# EAGLE board MMDC_1 (EAGLE 5.01)
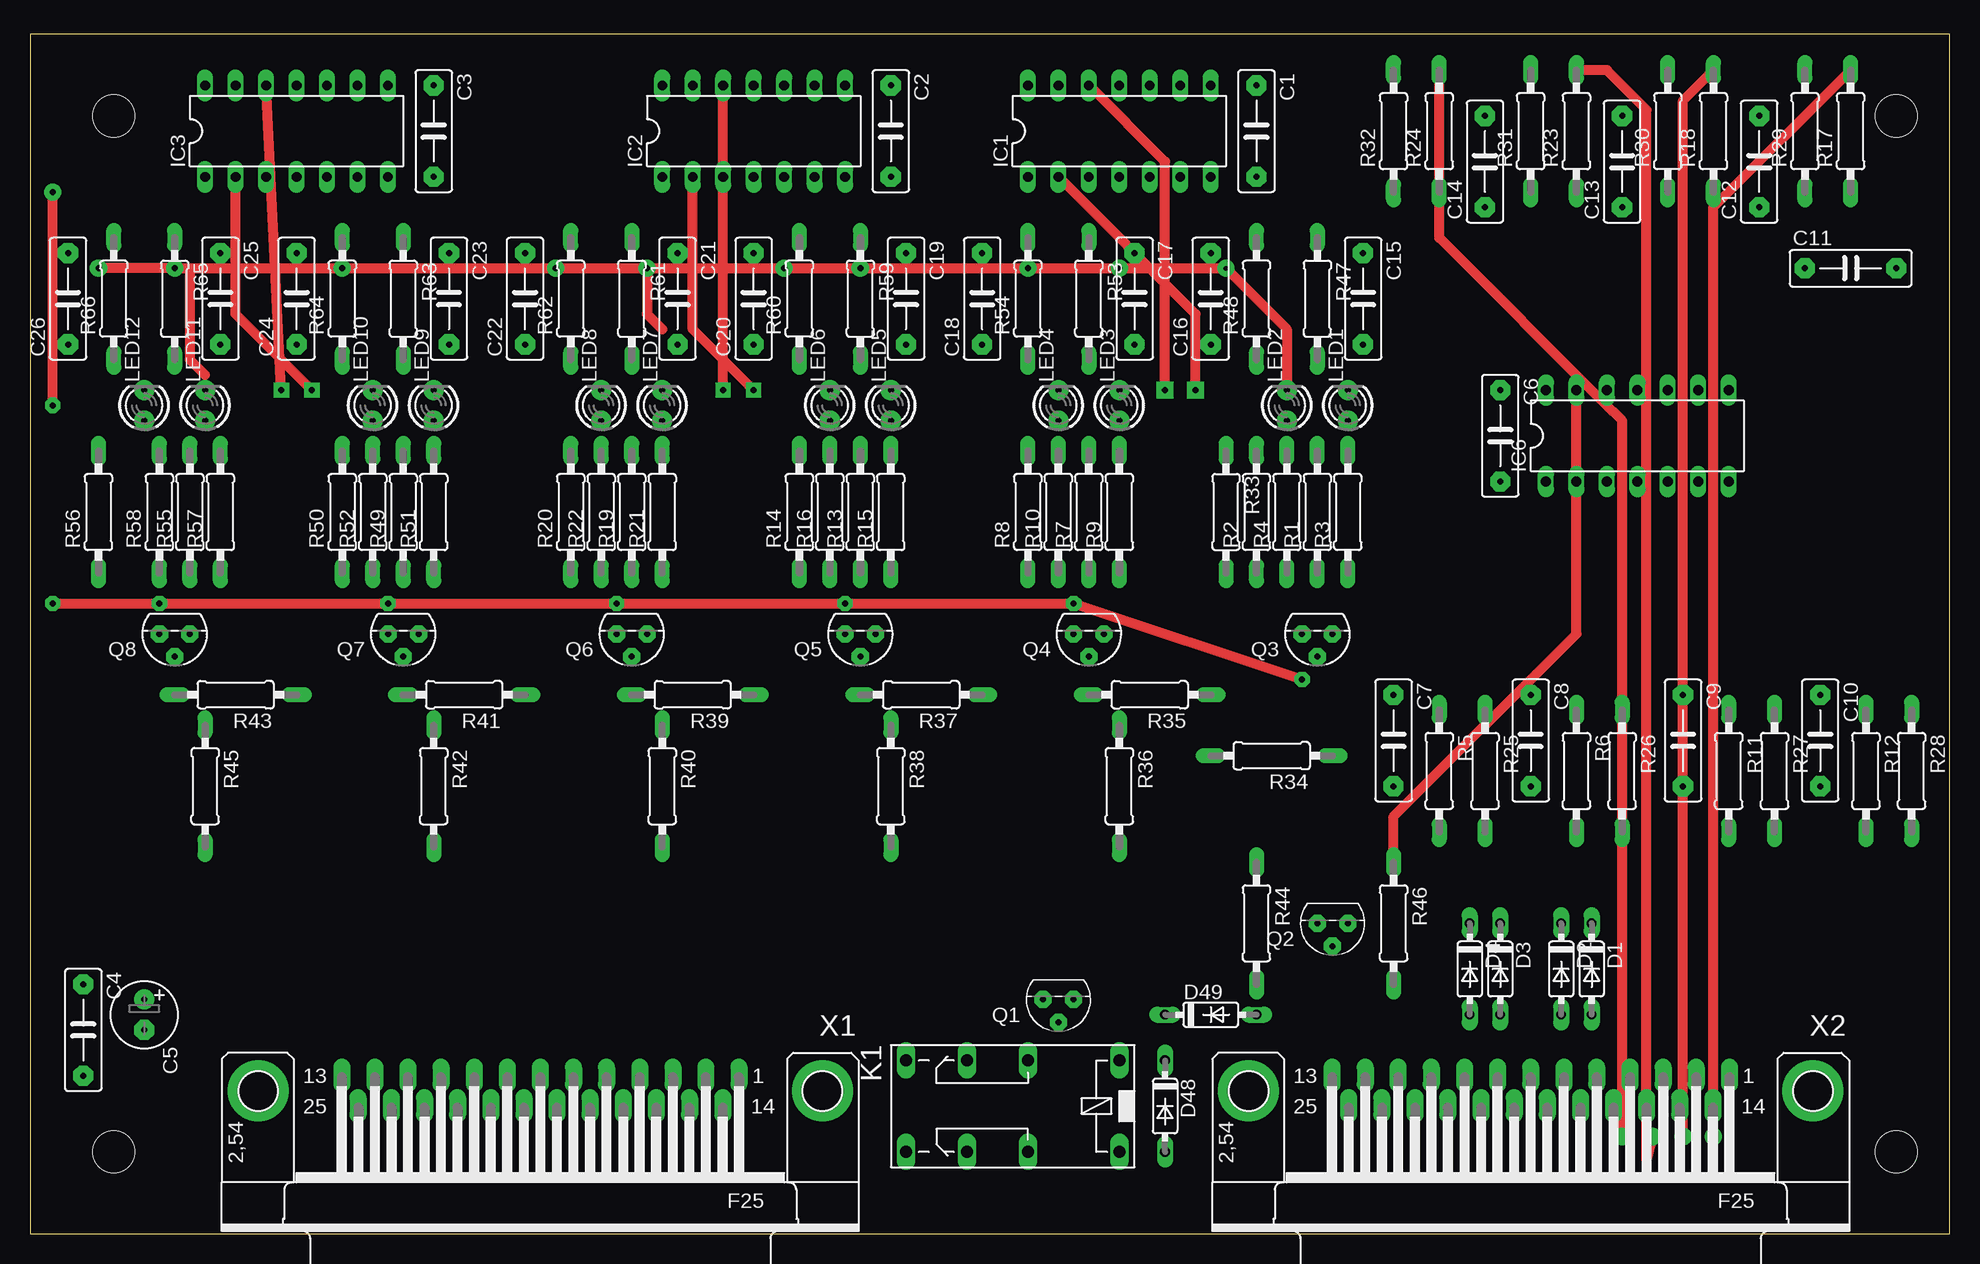
[diagram p0: board, top side]
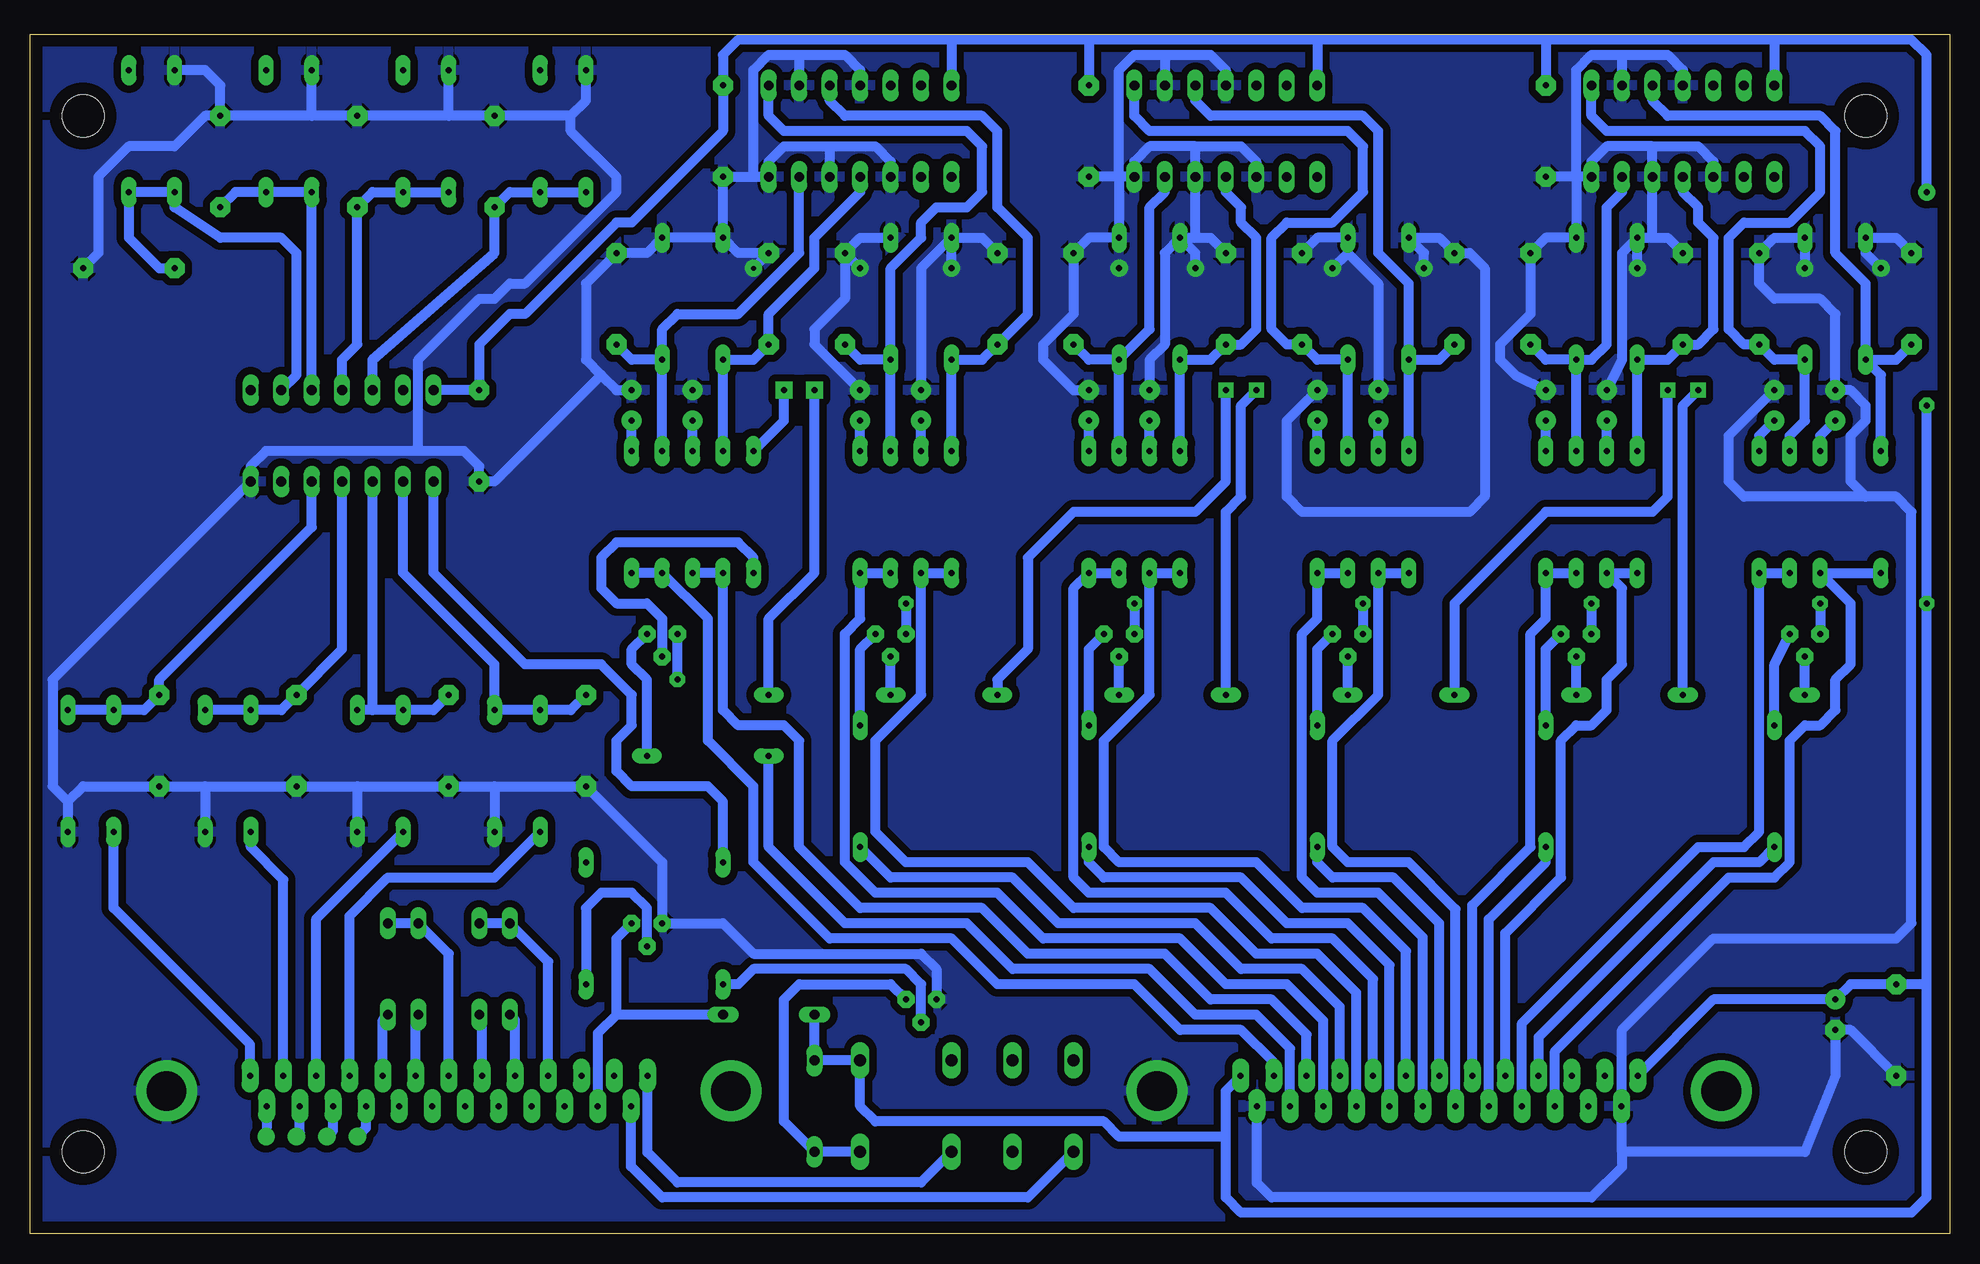
[diagram p1: board, bottom side, seen from below]

Size 160 x 100 mm. Coordinates in mm from the lower left corner, seen from the top.
Outline: 0,0 160,0 160,100 0,100 0,0
Copper layers (1*16): Top 0.035mm / dielectric 1.5mm / Bottom 0.035mm
Design rules "default *": minimum track width 10mil, minimum drill 24mil, track to track 8mil, track to pad 8mil, pad to pad 8mil, via to via 8mil, smd to smd 8mil, copper to edge 40mil, drill to drill 8mil, minimum pad ring 10mil, minimum via ring 8mil, stop-mask expansion 4mil, vias tented up to drill 0mil, thermal gap 10mil
Holes 3.5 mm at 6.98,6.82 6.98,93.18 155.57,6.82 155.57,93.18

## Footprints (pad centres in the part's own frame; a part is rotated, then mirrored left to right if it is on the bottom)
C075-032X103_XL_PAD = drill 0.5 pad 1.676 octagon: 1 -3.81,0; 2 3.81,0
E2,5-6_XL_PAD = drill 0.5 pad 1.676 round: + -1.27,0 | drill 0.5 pad 1.676 octagon: - 1.27,0
DO35-7 = drill 0.813 long: A 3.81,0; C -3.81,0
DIL14 = drill 0.813 long: 1 -7.62,-3.81; 2 -5.08,-3.81; 3 -2.54,-3.81; 4 0,-3.81; 5 2.54,-3.81; 6 5.08,-3.81; 7 7.62,-3.81; 8 7.62,3.81; 9 5.08,3.81; 10 2.54,3.81; 11 0,3.81; 12 -2.54,3.81; 13 -5.08,3.81; 14 -7.62,3.81
351 = drill 1.016 long: 1 -3.81,-3.81; 16 -3.81,3.81; O1 8.89,-3.81; O2 8.89,3.81; P1 3.81,-3.81; P2 3.81,3.81; S1 13.97,-3.81; S2 13.97,3.81
LED3MM_XL_PAD = drill 0.5 pad 1.676 round: A -1.27,0; K 1.27,0
TO92_XL_PAD = drill 0.5 pad 1.422 octagon: 1 1.27,0; 2 0,1.905; 3 -1.27,0
0207/10_OVAL = drill 0.5 pad 1.27 long: 1 -5.08,0; 2 5.08,0
F25HP_XL_PAD = drill 0.5 pad 1.422 long: 1 -16.561,-1.27; 2 -13.792,-1.27; 3 -11.049,-1.27; 4 -8.28,-1.27; 5 -5.512,-1.27; 6 -2.769,-1.27; 7 0,-1.27; 8 2.769,-1.27; 9 5.512,-1.27; 10 8.28,-1.27; 11 11.049,-1.27; 12 13.792,-1.27; 13 16.561,-1.27; 14 -15.189,1.27; 15 -12.421,1.27; 16 -9.652,1.27; 17 -6.909,1.27; 18 -4.14,1.27; 19 -1.372,1.27; 20 1.372,1.27; 21 4.14,1.27; 22 6.909,1.27; 23 9.652,1.27; 24 12.421,1.27; 25 15.189,1.27 | drill 3.302 pad 5.08 round: G1 -23.52,0; G2 23.52,0

## Placement (x,y rotation side)
C1  100nF  [C075-032X103_XL_PAD]  102.23,91.91 270 top
C2  100nF  [C075-032X103_XL_PAD]  71.75,91.91 270 top
C3  100nF  [C075-032X103_XL_PAD]  33.65,91.91 270 top
C4  100nF  [C075-032X103_XL_PAD]  4.44,16.98 270 top
C5  100uF  [E2,5-6_XL_PAD]  9.52,18.25 270 top
C6  100nF  [C075-032X103_XL_PAD]  122.55,66.51 270 top
C7  100nF  [C075-032X103_XL_PAD]  113.66,41.11 270 top
C8  100nF  [C075-032X103_XL_PAD]  125.09,41.11 270 top
C9  100nF  [C075-032X103_XL_PAD]  137.79,41.11 270 top
C10  100nF  [C075-032X103_XL_PAD]  149.22,41.11 270 top
C11  100nF  [C075-032X103_XL_PAD]  151.76,80.48 0 top
C12  100nF  [C075-032X103_XL_PAD]  144.14,89.37 90 top
C13  100nF  [C075-032X103_XL_PAD]  132.71,89.37 90 top
C14  100nF  [C075-032X103_XL_PAD]  121.28,89.37 90 top
C15  100nF  [C075-032X103_XL_PAD]  111.12,77.94 270 top
C16  100nF  [C075-032X103_XL_PAD]  98.42,77.94 90 top
C17  100nF  [C075-032X103_XL_PAD]  92.07,77.94 270 top
C18  100nF  [C075-032X103_XL_PAD]  79.37,77.94 90 top
C19  100nF  [C075-032X103_XL_PAD]  73.02,77.94 270 top
C20  100nF  [C075-032X103_XL_PAD]  60.32,77.94 90 top
C21  100nF  [C075-032X103_XL_PAD]  53.97,77.94 270 top
C22  100nF  [C075-032X103_XL_PAD]  41.27,77.94 90 top
C23  100nF  [C075-032X103_XL_PAD]  34.92,77.94 270 top
C24  100nF  [C075-032X103_XL_PAD]  22.22,77.94 90 top
C25  100nF  [C075-032X103_XL_PAD]  15.87,77.94 270 top
C26  100nF  [C075-032X103_XL_PAD]  3.17,77.94 90 top
D1  1N4148DO35-7  [DO35-7]  130.17,22.06 270 top
D2  1N4148DO35-7  [DO35-7]  127.63,22.06 270 top
D3  1N4148DO35-7  [DO35-7]  122.55,22.06 270 top
D4  1N4148DO35-7  [DO35-7]  120.01,22.06 270 top
D48  shotcky  [DO35-7]  94.61,10.63 270 top
D49  shotcky  [DO35-7]  98.42,18.25 0 top
IC1  4013N  [DIL14]  90.8,91.91 0 top
IC2  4013N  [DIL14]  60.32,91.91 0 top
IC3  4013N  [DIL14]  22.22,91.91 0 top
IC6  4082N  [DIL14]  133.98,66.51 0 top
K1  351  [351]  86.99,10.63 180 top
LED1  red  [LED3MM_XL_PAD]  109.85,69.05 90 top
LED2  red  [LED3MM_XL_PAD]  104.77,69.05 90 top
LED3  red  [LED3MM_XL_PAD]  90.8,69.05 90 top
LED4  red  [LED3MM_XL_PAD]  85.72,69.05 90 top
LED5  red  [LED3MM_XL_PAD]  71.75,69.05 90 top
LED6  red  [LED3MM_XL_PAD]  66.67,69.05 90 top
LED7  red  [LED3MM_XL_PAD]  52.7,69.05 90 top
LED8  red  [LED3MM_XL_PAD]  47.62,69.05 90 top
LED9  red  [LED3MM_XL_PAD]  33.65,69.05 90 top
LED10  red  [LED3MM_XL_PAD]  28.57,69.05 90 top
LED11  red  [LED3MM_XL_PAD]  14.6,69.05 90 top
LED12  red  [LED3MM_XL_PAD]  9.52,69.05 90 top
Q1  BC547"  [TO92_XL_PAD]  85.72,19.52 180 top
Q2  BC547"  [TO92_XL_PAD]  108.58,25.87 180 top
Q3  BC557"  [TO92_XL_PAD]  107.31,50 180 top
Q4  BC557"  [TO92_XL_PAD]  88.26,50 180 top
Q5  BC557"  [TO92_XL_PAD]  69.21,50 180 top
Q6  BC557"  [TO92_XL_PAD]  50.16,50 180 top
Q7  BC557"  [TO92_XL_PAD]  31.11,50 180 top
Q8  BC557"  [TO92_XL_PAD]  12.06,50 180 top
R1  10K  [0207/10_OVAL]  107.31,60.16 90 top
R2  10K  [0207/10_OVAL]  102.23,60.16 90 top
R3  500E  [0207/10_OVAL]  109.85,60.16 90 top
R4  500E  [0207/10_OVAL]  104.77,60.16 90 top
R5  10K  [0207/10_OVAL]  117.47,38.57 270 top
R6  10K  [0207/10_OVAL]  128.9,38.57 270 top
R7  10K  [0207/10_OVAL]  88.26,60.16 90 top
R8  10K  [0207/10_OVAL]  83.18,60.16 90 top
R9  500E  [0207/10_OVAL]  90.8,60.16 90 top
R10  500E  [0207/10_OVAL]  85.72,60.16 90 top
R11  10K  [0207/10_OVAL]  141.6,38.57 270 top
R12  10K  [0207/10_OVAL]  153.03,38.57 270 top
R13  10K  [0207/10_OVAL]  69.21,60.16 90 top
R14  10K  [0207/10_OVAL]  64.13,60.16 90 top
R15  500E  [0207/10_OVAL]  71.75,60.16 90 top
R16  500E  [0207/10_OVAL]  66.67,60.16 90 top
R17  10K  [0207/10_OVAL]  151.76,91.91 90 top
R18  10K  [0207/10_OVAL]  140.33,91.91 90 top
R19  10K  [0207/10_OVAL]  50.16,60.16 90 top
R20  10K  [0207/10_OVAL]  45.08,60.16 90 top
R21  500E  [0207/10_OVAL]  52.7,60.16 90 top
R22  500E  [0207/10_OVAL]  47.62,60.16 90 top
R23  10K  [0207/10_OVAL]  128.9,91.91 90 top
R24  10K  [0207/10_OVAL]  117.47,91.91 90 top
R25  100K  [0207/10_OVAL]  121.28,38.57 270 top
R26  100K  [0207/10_OVAL]  132.71,38.57 270 top
R27  100K  [0207/10_OVAL]  145.41,38.57 270 top
R28  100K  [0207/10_OVAL]  156.84,38.57 270 top
R29  100K  [0207/10_OVAL]  147.95,91.91 90 top
R30  100K  [0207/10_OVAL]  136.52,91.91 90 top
R31  100K  [0207/10_OVAL]  125.09,91.91 90 top
R32  100K  [0207/10_OVAL]  113.66,91.91 90 top
R33  47K  [0207/10_OVAL]  99.69,60.16 270 top
R34  560E  [0207/10_OVAL]  103.5,39.84 180 top
R35  47K  [0207/10_OVAL]  93.34,44.92 180 top
R36  560E  [0207/10_OVAL]  90.8,37.3 270 top
R37  47K  [0207/10_OVAL]  74.29,44.92 180 top
R38  560E  [0207/10_OVAL]  71.75,37.3 270 top
R39  47K  [0207/10_OVAL]  55.24,44.92 180 top
R40  560E  [0207/10_OVAL]  52.7,37.3 270 top
R41  47K  [0207/10_OVAL]  36.19,44.92 180 top
R42  560E  [0207/10_OVAL]  33.65,37.3 270 top
R43  47K  [0207/10_OVAL]  17.14,44.92 180 top
R44  68K  [0207/10_OVAL]  102.23,25.87 270 top
R45  560E  [0207/10_OVAL]  14.6,37.3 270 top
R46  20K  [0207/10_OVAL]  113.66,25.87 270 top
R47  100K  [0207/10_OVAL]  107.31,77.94 270 top
R48  100K  [0207/10_OVAL]  102.23,77.94 90 top
R49  10K  [0207/10_OVAL]  31.11,60.16 90 top
R50  10K  [0207/10_OVAL]  26.03,60.16 90 top
R51  500E  [0207/10_OVAL]  33.65,60.16 90 top
R52  500E  [0207/10_OVAL]  28.57,60.16 90 top
R53  100K  [0207/10_OVAL]  88.26,77.94 270 top
R54  100K  [0207/10_OVAL]  83.18,77.94 90 top
R55  10K  [0207/10_OVAL]  13.33,60.16 90 top
R56  10K  [0207/10_OVAL]  5.71,60.16 90 top
R57  500E  [0207/10_OVAL]  15.87,60.16 90 top
R58  500E  [0207/10_OVAL]  10.79,60.16 90 top
R59  100K  [0207/10_OVAL]  69.21,77.94 270 top
R60  100K  [0207/10_OVAL]  64.13,77.94 90 top
R61  100K  [0207/10_OVAL]  50.16,77.94 270 top
R62  100K  [0207/10_OVAL]  45.08,77.94 90 top
R63  100K  [0207/10_OVAL]  31.11,77.94 270 top
R64  100K  [0207/10_OVAL]  26.03,77.94 90 top
R65  100K  [0207/10_OVAL]  12.06,77.94 270 top
R66  100K  [0207/10_OVAL]  6.98,77.94 90 top
X1  IO  [F25HP_XL_PAD]  42.54,11.9 180 top
X2  MMDC  [F25HP_XL_PAD]  125.09,11.9 180 top

## Library data of the parts
C1-C4 C6-C26 = rcl
C5 R1-R66 = resistor
D1-D4 D48 D49 = diode
IC1-IC3 IC6 = 40xx
K1 = relay
LED1-LED12 = led
Q1 Q2 = transistor-npn
Q3-Q8 = transistor-pnp
X1 X2 = con-subd

## Nets
BLOK6BUIT: C11.1 IC6.9 R17.1 R29.1
N$1: C15.2 IC1.6 R1.2 R47.2
N$2: C16.1 IC1.4 R2.2 R48.1
N$3: LED1.A R3.2
N$4: LED2.A R4.2
N$5: C7.1 IC6.2 R5.1 R25.1
N$6: R12.2 X2.1
N$7: R19.1 R21.1 X1.19
N$8: R20.1 R22.1 X1.20
N$9: C12.1 IC6.10 R18.1 R30.1
N$10: R7.1 R9.1 X1.16
N$11: R8.1 R10.1 X1.17
N$12: LED3.A R9.2
N$13: LED4.A R10.2
N$14: C8.1 IC6.3 R6.1 R26.1
N$15: C9.1 IC6.4 R11.1 R27.1
N$16: C10.1 IC6.5 R12.1 R28.1
N$17: C19.2 IC2.6 R13.2 R59.2
N$18: R14.1 R16.1 X1.6
N$19: LED5.A R15.2
N$20: LED6.A R16.2
N$21: R11.2 X2.2
N$22: R6.2 X2.3
N$23: R5.2 X2.4
N$24: LED7.A R21.2
N$25: LED8.A R22.2
N$26: C13.1 IC6.11 R23.1 R31.1
N$27: R17.2 X2.14
N$28: C14.1 IC6.12 R24.1 R32.1
N$29: D1.A X2.5
N$30: D2.A X2.6
N$31: D1.C D2.C X2.7
N$32: R18.2 X2.15
N$33: R23.2 X2.16
N$34: R24.2 X2.17
N$35: D3.A X2.8
N$36: D4.A X2.9
N$37: D3.C D4.C X2.10
N$38: IC1.2 R33.1
N$39: Q3.2 R33.2
N$40: Q3.3 R34.1
N$41: IC1.12 R35.1
N$42: Q4.2 R35.2
N$43: Q4.3 R36.1
N$44: IC2.2 R37.1
N$45: Q5.2 R37.2
N$46: Q5.3 R38.1
N$47: IC2.12 R39.1
N$48: Q6.2 R39.2
N$49: Q6.3 R40.1
N$50: IC3.2 R41.1
N$51: Q7.2 R41.2
N$52: Q7.3 R42.1
N$53: IC3.12 R43.1
N$54: Q8.2 R43.2
N$55: Q8.3 R45.1
N$56: R34.2 X1.15
N$57: R1.1 R3.1 X1.2
N$58: R2.1 R4.1 X1.3
N$59: C17.2 IC1.8 R7.2 R53.2
N$60: C18.1 IC1.10 R8.2 R54.1
N$61: R49.1 R51.1 X1.8
N$62: R50.1 R52.1 X1.9
N$63: LED9.A R51.2
N$64: LED10.A R52.2
N$65: R13.1 R15.1 X1.5
N$66: C20.1 IC2.4 R14.2 R60.1
N$67: C21.2 IC2.8 R19.2 R61.2
N$68: R55.1 R57.1 X1.22
N$69: R56.1 R58.1 X1.23
N$70: LED11.A R57.2
N$71: LED12.A R58.2
N$72: C22.1 IC2.10 R20.2 R62.1
N$73: C25.2 IC3.8 R55.2 R65.2
N$74: C26.1 IC3.10 R56.2 R66.1
N$75: C23.2 IC3.6 R49.2 R63.2
N$76: D48.A K1.16 Q1.3
N$77: IC6.1 R44.1
N$78: Q1.2 R44.2
N$79: IC6.13 R46.1
N$80: C24.1 IC3.4 R50.2 R64.1
N$81: D49.A Q2.3 X2.24
N$82: Q2.2 R46.2
N$85: R36.2 X1.4
N$86: R38.2 X1.18
N$87: R40.2 X1.7
N$88: R42.2 X1.21
N$89: R45.2 X1.10
N$90: K1.S2 X2.25
N$91: K1.P2 X2.13
VDD: C1.1 C2.1 C3.1 C4.1 C5.+ C6.1 D48.C D49.C IC1.14 IC2.14 IC3.14 IC6.14 K1.1 Q3.1 Q4.1 Q5.1 Q6.1 Q7.1 Q8.1 X1.1 X1.13
VSS: C1.2 C2.2 C3.2 C4.2 C5.- C6.2 C7.2 C8.2 C9.2 C10.2 C11.2 C12.2 C13.2 C14.2 C15.1 C16.2 C17.1 C18.2 C19.1 C20.2 C21.1 C22.2 C23.1 C24.2 C25.1 C26.2 IC1.3 IC1.5 IC1.7 IC1.9 IC1.11 IC2.3 IC2.5 IC2.7 IC2.9 IC2.11 IC3.3 IC3.5 IC3.7 IC3.9 IC3.11 IC6.7 LED1.K LED2.K LED3.K LED4.K LED5.K LED6.K LED7.K LED8.K LED9.K LED10.K LED11.K LED12.K Q1.1 Q2.1 R25.2 R26.2 R27.2 R28.2 R29.2 R30.2 R31.2 R32.2 R47.1 R48.2 R53.1 R54.2 R59.1 R60.2 R61.1 R62.2 R63.1 R64.2 R65.1 R66.2 X1.14 X1.25 X1.G1 X2.G1

## Tracks (layer width: path | path; a pad name or v marks a point on that pad's centre or on a via)
BLOK6BUIT
  Bottom 0.813: IC6.9 137.79,71.59 137.79,81.75 139.06,83.02 144.14,83.02 147.95,85.56 R29.1 R17.1 151.76,83.02 149.22,80.48 C11.1
N$1
  Bottom 0.813: R47.2 109.85,72.86 C15.2 | R1.2 R47.2 | R47.2 107.31,75.4 106.04,76.67 100.96,76.67 95.88,81.75 IC1.6
N$2
  Bottom 0.813: R2.2 R48.1 99.69,72.86 C16.1 98.42,76.67 94.61,80.48 94.61,83.02 90.8,86.83 IC1.4
N$3
  Bottom 0.813: R3.2 LED1.A
N$4
  Bottom 0.813: R4.2 LED2.A
N$5
  Bottom 0.813: C7.1 114.93,43.65 R5.1 R25.1 121.28,47.46 128.9,55.08 IC6.2
N$6
  Bottom 0.813: X2.1 141.65,15.76 153.03,27.14 R12.2
N$7
  Bottom 0.813: R19.1 R21.1 52.7,51.27 53.97,50 53.97,29.68 52.7,28.41 47.62,28.41 43.91,24.7 X1.19
N$8
  Bottom 0.813: X1.20 41.17,27.04 45.08,30.95 50.16,30.95 51.43,32.22 51.43,41.11 47.62,44.92 R22.1 R20.1
N$9
  Bottom 0.813: C12.1 142.87,86.83 R18.1 R30.1 IC6.10
N$10
  Bottom 0.813: R7.1 R9.1 90.8,51.27 92.07,50 92.07,30.95 89.53,28.41 79.37,28.41 75.56,24.6 64.13,24.6 60.32,20.79 55.24,20.79 52.19,17.74 X1.16
N$11
  Bottom 0.813: R8.1 R10.1 85.72,44.92 89.53,41.11 89.53,33.49 86.99,30.95 76.83,30.95 73.02,27.14 61.59,27.14 57.78,23.33 52.7,23.33 49.45,20.08 X1.17
N$12
  Bottom 0.813: R9.2 LED3.A
N$13
  Bottom 0.813: R10.2 LED4.A
N$14
  Bottom 0.813: C8.1 126.36,43.65 R6.1 131.44,43.65 | 131.44,43.65 R26.1 | 131.44,43.65 IC6.3
N$15
  Bottom 0.813: R27.1 R11.1 139.06,43.65 C9.1 133.98,48.73 IC6.4
N$16
  Bottom 0.813: R28.1 R12.1 150.49,43.65 C10.1 149.22,46.19 136.52,58.89 IC6.5
N$17
  Bottom 0.813: R59.2 71.75,72.86 C19.2 | IC2.6 65.4,86.83 66.67,85.56 66.67,75.4 R59.2 | R13.2 R59.2
N$18
  Bottom 0.813: R14.1 R16.1 66.67,44.92 70.48,41.11 70.48,32.22 69.21,30.95 57.78,30.95 53.97,27.14 48.89,27.14 45.31,23.56 X1.6
N$19
  Bottom 0.813: R15.2 LED5.A
N$20
  Bottom 0.813: R16.2 LED6.A
N$21
  Bottom 0.813: X2.2 138.88,29.5 141.6,32.22 R11.2
N$22
  Bottom 0.813: X2.3 136.14,26.25 R6.2
N$23
  Bottom 0.813: X2.4 133.37,26.48 130.17,29.68 121.28,29.68 R5.2
N$24
  Bottom 0.813: R21.2 LED7.A
N$25
  Bottom 0.813: R22.2 LED8.A
N$26
  Bottom 0.813: R31.1 R23.1 131.44,86.83 C13.1 132.71,74.13 133.98,72.86 IC6.11
N$27  (via drill 0 pad 1.42)
  Top 0.813: 140.33,85.56 140.28,85.51 | 140.33,85.56 R17.2 | v140.33,8.09 140.33,85.56
  Bottom 0.813: X2.14 140.28,9.41 v140.33,8.09
N$28
  Bottom 0.813: R32.1 R24.1 120.01,86.83 C14.1 121.28,81.75 131.44,72.86 IC6.12
N$29
  Bottom 0.813: X2.5 130.6,17.82 D1.A
N$30
  Bottom 0.813: X2.6 127.86,18.02 D2.A
N$31
  Bottom 0.813: D1.C D2.C 125.09,23.33 X2.7
N$32  (via drill 0 pad 1.42)
  Top 0.813: R18.2 137.79,94.45 v137.79,8.09
  Bottom 0.813: X2.15 137.51,8.37 v137.79,8.09
N$33  (via drill 0 pad 1.42)
  Top 0.813: R23.2 131.44,96.99 134.74,93.69 134.74,6.06 v135.25,8.09
  Bottom 0.813: X2.16 134.74,8.6 v135.25,8.09
N$34  (via drill 0 pad 1.42)
  Top 0.813: 131.44,69.05 132,68.49 | 131.44,69.05 117.47,83.02 R24.2 | v132.71,8.09 132.71,67.78 131.44,69.05
  Bottom 0.813: X2.17 132,8.8 v132.71,8.09
N$35
  Bottom 0.813: X2.8 122.32,18.02 D3.A
N$36
  Bottom 0.813: X2.9 119.58,17.82 D4.A
N$37
  Bottom 0.813: D3.C D4.C 116.81,22.67 X2.10
N$38  (via drill 0.5 pad 1.42)
  Top 0.813: v97.15,70.32 97.15,76.67 IC1.2
  Bottom 0.813: R33.1 97.15,67.78 v97.15,70.32
N$39
  Bottom 0.813: R33.2 99.69,56.35 100.96,57.62 111.12,57.62 112.39,56.35 112.39,53.81 111.12,52.54 108.58,52.54 107.31,51.27 Q3.2
N$40
  Bottom 0.813: R34.1 108.58,46.19 109.85,47.46 109.85,48.73 Q3.3
N$41  (via drill 0.5 pad 1.42)
  Top 0.813: v94.61,70.32 94.61,89.37 IC1.12
  Bottom 0.813: R35.1 98.42,51.27 94.61,55.08 v94.61,70.32
N$42
  Bottom 0.813: R35.2 Q4.2
N$43
  Bottom 0.813: R36.1 90.8,48.73 Q4.3
N$44  (via drill 0.5 pad 1.27)
  Top 0.813: v60.32,70.32 55.24,75.4 IC2.2
  Bottom 0.813: R37.1 79.37,46.19 76.83,48.73 76.83,56.35 73.02,60.16 62.86,60.16 60.32,62.7 v60.32,70.32
N$45
  Bottom 0.813: R37.2 Q5.2
N$46
  Bottom 0.813: R38.1 71.75,48.73 Q5.3
N$47  (via drill 0.5 pad 1.27)
  Top 0.813: v57.78,70.32 IC2.12
  Bottom 0.813: R39.1 60.32,60.16 59.05,61.43 59.05,69.05 v57.78,70.32
N$48
  Bottom 0.813: R39.2 Q6.2
N$49
  Bottom 0.813: R40.1 52.7,48.73 Q6.3
N$50  (via drill 0.5 pad 1.27)
  Top 0.813: v23.49,70.32 17.14,76.67 IC3.2
  Bottom 0.813: R41.1 41.27,52.54 33.65,60.16 24.76,60.16 23.49,61.43 v23.49,70.32
N$51
  Bottom 0.813: R41.2 Q7.2
N$52
  Bottom 0.813: R42.1 33.65,48.73 Q7.3
N$53  (via drill 0.5 pad 1.27)
  Top 0.813: v20.95,70.32 IC3.12
  Bottom 0.813: R43.1 22.22,69.05 v20.95,70.32
N$54
  Bottom 0.813: R43.2 Q8.2
N$55
  Bottom 0.813: R45.1 14.6,47.46 Q8.3
N$56
  Bottom 0.813: X1.15 54.96,15.43 57.78,18.25 62.86,18.25 66.67,22.06 78.1,22.06 81.91,25.87 92.07,25.87 98.42,32.22 R34.2
N$57
  Bottom 0.813: X1.2 56.33,14.26 59.05,16.98 64.13,16.98 67.94,20.79 79.37,20.79 83.18,24.6 93.34,24.6 99.69,30.95 99.69,37.3 103.5,41.11 103.5,51.27 R1.1 R3.1
N$58
  Bottom 0.813: R4.1 R2.1 102.23,43.65 100.96,42.38 97.15,42.38 95.88,41.11 95.88,32.22 90.8,27.14 80.64,27.14 76.83,23.33 65.4,23.33 61.59,19.52 56.51,19.52 53.59,16.6 X1.3
N$59
  Bottom 0.813: R7.2 R53.2 | R53.2 90.8,72.86 C17.2 | IC1.8 98.42,93.18 97.15,91.91 81.91,91.91 80.64,90.64 80.64,86.83 81.91,85.56 84.45,85.56 85.72,84.29 85.72,83.02 88.26,80.48 R53.2
N$60
  Bottom 0.813: R8.2 R54.1 80.64,72.86 C18.1 76.83,76.67 76.83,83.02 79.37,85.56 79.37,91.91 80.64,93.18 92.07,93.18 93.34,94.45 IC1.10
N$61
  Bottom 0.813: R49.1 R51.1 33.65,51.27 34.92,50 34.92,32.22 39.77,27.37 X1.8
N$62
  Bottom 0.813: X1.9 37.03,25.03 32.38,29.68 32.38,41.11 31.11,42.38 29.84,42.38 28.57,43.65 28.57,46.19 27.3,47.46 27.3,53.81 R52.1 R50.1
N$63
  Bottom 0.813: R51.2 LED9.A
N$64
  Bottom 0.813: R52.2 LED10.A
N$65
  Bottom 0.813: R13.1 R15.1 73.02,53.81 73.02,29.68 71.75,28.41 60.32,28.41 56.51,24.6 51.43,24.6 48.05,21.22 X1.5
N$66
  Bottom 0.813: R14.2 R60.1 61.59,72.86 C20.1 59.05,74.13 57.78,75.4 57.78,83.02 59.05,84.29 59.05,85.56 60.32,86.83 IC2.4
N$67
  Bottom 0.813: R19.2 R61.2 52.7,72.86 C21.2 55.24,74.13 56.51,75.4 56.51,83.02 55.24,84.29 51.43,84.29 48.89,86.83 48.89,90.64 50.16,91.91 66.67,91.91 67.94,93.18 IC2.8
N$68
  Bottom 0.813: R55.1 R57.1 15.87,33.49 17.14,32.22 20.95,32.22 35.63,17.54 X1.22
N$69
  Bottom 0.813: X1.23 32.89,15.2 18.41,29.68 14.6,29.68 13.33,30.95 13.33,41.11 12.06,42.38 10.79,42.38 9.52,43.65 9.52,46.19 8.25,47.46 8.25,52.54 R58.1 R56.1
N$70
  Bottom 0.813: R57.2 15.87,66.51 LED11.A
N$71
  Bottom 0.813: R58.2 10.79,66.51 LED12.A
N$72
  Bottom 0.813: R20.2 R62.1 | R62.1 42.54,72.86 C22.1 | IC2.10 62.86,94.45 61.59,93.18 48.89,93.18 47.62,91.91 47.62,81.75 45.08,79.21 R62.1
N$73
  Bottom 0.813: IC3.8 29.84,93.18 28.57,91.91 12.06,91.91 10.79,90.64 10.79,86.83 13.33,84.29 17.14,84.29 18.41,83.02 18.41,75.4 17.14,74.13 C25.2 14.6,72.86 R65.2 12.06,67.78 13.33,66.51 R55.2
N$74
  Bottom 0.813: R66.1 4.44,72.86 C26.1 | R66.1 6.98,79.21 9.52,81.75 9.52,91.91 10.79,93.18 23.49,93.18 24.76,94.45 IC3.10 | R56.2 5.71,71.59 R66.1
N$75
  Bottom 0.813: R63.2 33.65,72.86 C23.2 | R49.2 R63.2 | IC3.6 27.3,86.83 28.57,85.56 28.57,74.13 29.84,72.86 R63.2
N$76
  Bottom 0.813: K1.16 D48.A 97.15,9.36 97.15,19.52 95.88,20.79 88.26,20.79 Q1.3
N$77
  Bottom 0.813: IC6.1 126.36,55.08 118.74,47.46 112.39,47.46 109.85,44.92 109.85,42.38 111.12,41.11 111.12,38.57 109.85,37.3 103.5,37.3 102.23,36.03 R44.1
N$78
  Bottom 0.813: R44.2 100.96,20.79 99.69,22.06 86.99,22.06 85.72,20.79 Q1.2
N$79
  Top 0.813: IC6.13 128.9,50 113.66,34.76 R46.1
N$80
  Bottom 0.813: R50.2 R64.1 23.49,72.86 C24.1 20.95,74.13 19.68,75.4 19.68,83.02 20.95,84.29 20.95,85.56 22.22,86.83 IC3.4
N$81
  Bottom 0.813: Q2.3 111.12,24.6 111.12,18.25 | X2.24 112.67,16.7 111.12,18.25 | D49.A 111.12,18.25
N$82
  Bottom 0.813: R46.2 113.66,27.14 112.39,28.41 109.85,28.41 108.58,27.14 Q2.2
N$83  (via drill 0.5 pad 3.56)
  other vias: 6.98,93.18
N$84  (via drill 0.5 pad 3.56)
  other vias: 6.98,6.82
N$85
  Bottom 0.813: X1.4 50.82,18.91 53.97,22.06 59.05,22.06 62.86,25.87 74.29,25.87 78.1,29.68 88.26,29.68 R36.2
N$86
  Bottom 0.813: X1.18 46.68,22.39 50.16,25.87 55.24,25.87 59.05,29.68 70.48,29.68 71.75,30.95 R38.2
N$87
  Bottom 0.813: X1.7 42.54,25.87 46.35,29.68 51.43,29.68 52.7,30.95 R40.2
N$88
  Bottom 0.813: R42.2 33.65,30.95 38.4,26.2 X1.21
N$89
  Bottom 0.813: X1.10 34.26,16.37 19.68,30.95 15.87,30.95 R45.2
N$90
  Bottom 0.813: X2.25 109.9,5.6 107.31,3.01 76.83,3.01 K1.S2
N$91
  Bottom 0.813: X2.13 108.53,6.77 106.04,4.28 85.72,4.28 K1.P2
N$92  (via drill 0.5 pad 3.56)
  other vias: 155.57,6.82
N$93  (via drill 0.5 pad 3.56)
  other vias: 155.57,93.18
VDD  (via drill 0.5 pad 1.27, 0.5 pad 1.42)
  Top 0.813: v1.9,52.54 v10.79,52.54 v29.84,52.54 v48.89,52.54 v67.94,52.54 v86.99,52.54 v106.04,46.19 | v1.9,69.05 v1.9,86.83
  Bottom 0.813: 14.6,99.53 IC3.14 | 14.6,99.53 33.65,99.53 | 33.65,99.53 52.7,99.53 | 52.7,99.53 71.75,99.53 | 71.75,99.53 83.18,99.53 | 83.18,99.53 100.96,99.53 102.23,98.26 C1.1 102.23,91.91 109.85,84.29 111.12,84.29 118.74,76.67 120.01,76.67 122.55,74.13 C6.1 IC6.14 | 83.18,99.53 IC1.14 | 71.75,99.53 C2.1 | 52.7,99.53 IC2.14 | 33.65,99.53 C3.1 | X1.1 59.1,13.12 60.32,11.9 60.32,8.09 | 60.32,8.09 60.32,3.01 59.05,1.74 3.17,1.74 1.9,3.01 1.9,20.79 | 1.9,20.79 C4.1 8.25,20.79 | 8.25,20.79 C5.+ 19.68,19.52 26.03,13.17 X1.13 | v10.79,52.54 Q8.1 | v29.84,52.54 Q7.1 | v48.89,52.54 Q6.1 | v67.94,52.54 Q5.1 | v86.99,52.54 Q4.1 | v106.04,46.19 Q3.1 | D49.C D48.C K1.1 90.8,10.63 89.53,9.36 70.48,9.36 69.21,8.09 60.32,8.09 | v1.9,86.83 1.9,98.26 3.17,99.53 14.6,99.53 | v1.9,69.05 v1.9,52.54 1.9,20.79 | 1.9,20.79 8.25,20.79
VSS  (via drill 0.38 pad 1.42, 0.5 pad 1.42)
  Top 0.813: v5.71,80.48 v12.06,80.48 13.33,80.48 | 13.33,80.48 v26.03,80.48 v43.81,80.48 v51.43,80.48 | v51.43,80.48 v62.86,80.48 v69.21,80.48 v83.18,80.48 v90.8,80.48 v99.69,80.48 104.77,75.4 LED2.K | 14.6,71.59 13.33,72.86 13.33,80.48 | 52.7,75.4 51.43,76.67 v51.43,80.48
  Bottom 0.813: R48.2 100.96,81.75 C16.2 v99.69,80.48 | C26.2 4.44,83.02 R66.2 6.98,81.75 v5.71,80.48 | C24.2 23.49,83.02 24.76,83.02 | C21.1 52.7,83.02 R61.1 50.16,81.75 | C18.2 80.64,83.02 R54.2 | R53.1 90.8,83.02 C17.1 | X1.14 57.73,4.23 56.51,3.01 29.84,3.01 27.3,5.55 27.3,6.82 | C4.2 8.25,16.98 C5.- 9.52,13.17 12.06,6.82 27.3,6.82 | 31.11,88.1 IC3.7 29.84,89.37 28.57,90.64 24.76,90.64 | 31.11,88.1 C3.2 | 24.76,90.64 20.95,90.64 19.68,89.37 IC3.3 | 24.76,90.64 IC3.5 24.76,83.02 | LED10.K 27.3,72.86 27.3,81.75 R64.2 | LED9.K 36.19,71.59 37.46,72.86 37.46,74.13 34.92,76.67 C23.1 33.65,83.02 R63.1 31.11,88.1 | R64.2 24.76,83.02 | 69.21,88.1 C2.2 | 62.86,90.64 59.05,90.64 57.78,89.37 IC2.3 | 62.86,90.64 66.67,90.64 67.94,89.37 IC2.7 69.21,88.1 | 62.86,90.64 IC2.5 62.86,83.02 | 69.21,88.1 R59.1 71.75,83.02 C19.1 73.02,76.67 75.56,74.13 75.56,72.86 73.02,70.32 LED5.K | C20.2 61.59,83.02 62.86,83.02 | R60.2 62.86,83.02 | LED6.K 66.67,72.86 65.4,74.13 65.4,81.75 R60.2 | LED8.K 47.62,79.21 50.16,81.75 | 99.69,88.1 C1.2 R48.2 | 99.69,88.1 IC1.7 98.42,89.37 97.15,90.64 93.34,90.64 | 93.34,90.64 89.53,90.64 88.26,89.37 IC1.3 | 93.34,90.64 IC1.5 | R48.2 R47.1 108.58,81.75 C15.1 113.66,79.21 113.66,72.86 112.39,71.59 | LED1.K 111.12,70.32 112.39,71.59 | LED3.K 94.61,74.13 94.61,75.4 92.07,77.94 C17.1 | LED4.K 85.72,80.48 R54.2 | 27.3,10.63 27.3,16.98 19.68,24.6 4.44,24.6 3.17,25.87 3.17,60.16 4.44,61.43 6.98,61.43 | 6.98,61.43 8.25,62.7 8.25,66.51 6.98,67.78 6.98,69.05 8.25,70.32 LED12.K 9.52,76.67 10.79,77.94 14.6,77.94 15.87,79.21 C25.1 14.6,83.02 R65.1 v12.06,80.48 | R60.2 62.86,81.75 v62.86,80.48 | v26.03,80.48 R64.2
  Bottom 0.813: v51.43,80.48 50.16,81.75 | v43.81,80.48 43.81,81.75 R62.2 42.54,83.02 C22.2 40,81.75 38.73,80.48 38.73,61.43 40,60.16 53.97,60.16 55.24,61.43 55.24,67.78 LED7.K | v83.18,80.48 R54.2 | v90.8,80.48 C17.1 | 127.63,65.24 123.82,65.24 122.55,63.97 C6.2 121.28,62.7 112.39,71.59 | 127.63,65.24 140.33,65.24 141.6,63.97 IC6.7 158.11,46.19 158.11,37.3 156.84,36.03 | 121.28,37.3 C7.2 107.31,30.95 Q2.1 102.23,25.87 99.69,23.33 85.72,23.33 84.45,22.06 Q1.1 | 121.28,37.3 C8.2 132.71,37.3 | 121.28,37.3 R25.2 | 132.71,37.3 C9.2 145.41,37.3 | 132.71,37.3 R26.2 | 145.41,37.3 C10.2 155.57,37.3 156.84,36.03 | 145.41,37.3 R27.2 | 136.52,93.18 C13.2 125.09,93.18 | 136.52,93.18 C12.2 | 125.09,93.18 C14.2 114.93,93.18 | R32.2 113.66,94.45 114.93,93.18 | 136.52,93.18 R30.2 | 125.09,93.18 R31.2 | 114.93,93.18 114.93,91.91 111.12,88.1 111.12,86.83 118.74,79.21 120.01,79.21 121.28,77.94 122.55,77.94 127.63,72.86 127.63,65.24 | 156.84,36.03 R28.2 | 27.3,10.63 X1.25 | 27.3,6.82 27.3,10.63 | C12.2 145.41,93.18 147.95,90.64 151.76,90.64 154.3,88.1 154.3,81.75 C11.2 | R29.2 145.41,96.99 144.14,95.72 C12.2 | LED11.K 18.41,66.51 18.41,62.7 17.14,61.43 6.98,61.43 | IC2.11 60.32,96.99 61.59,98.26 65.4,98.26 | 65.4,98.26 67.94,98.26 69.21,96.99 69.21,88.1 | 65.4,98.26 IC2.9 | IC1.11 90.8,96.99 92.07,98.26 95.88,98.26 | 95.88,98.26 98.42,98.26 99.69,96.99 99.69,88.1 | 95.88,98.26 IC1.9 | IC3.11 22.22,96.99 23.49,98.26 27.3,98.26 | 27.3,98.26 29.84,98.26 31.11,96.99 31.11,88.1 | 27.3,98.26 IC3.9
  pour Bottom (isolate 0.61): 0.63,99.53 159.38,99.53 159.38,0.47 -0.64,0.47 -0.64,99.53